# Altium PCB V2.pcbdoc
Units mm, origin at the board's own origin, x right, y up, seen from the top; angles counter-clockwise.
Board outline 51.05 x 52.08 mm, 2 copper layers (Top Layer, Bottom Layer); 21 components, 13 nets, 108 pads, 0 vias.
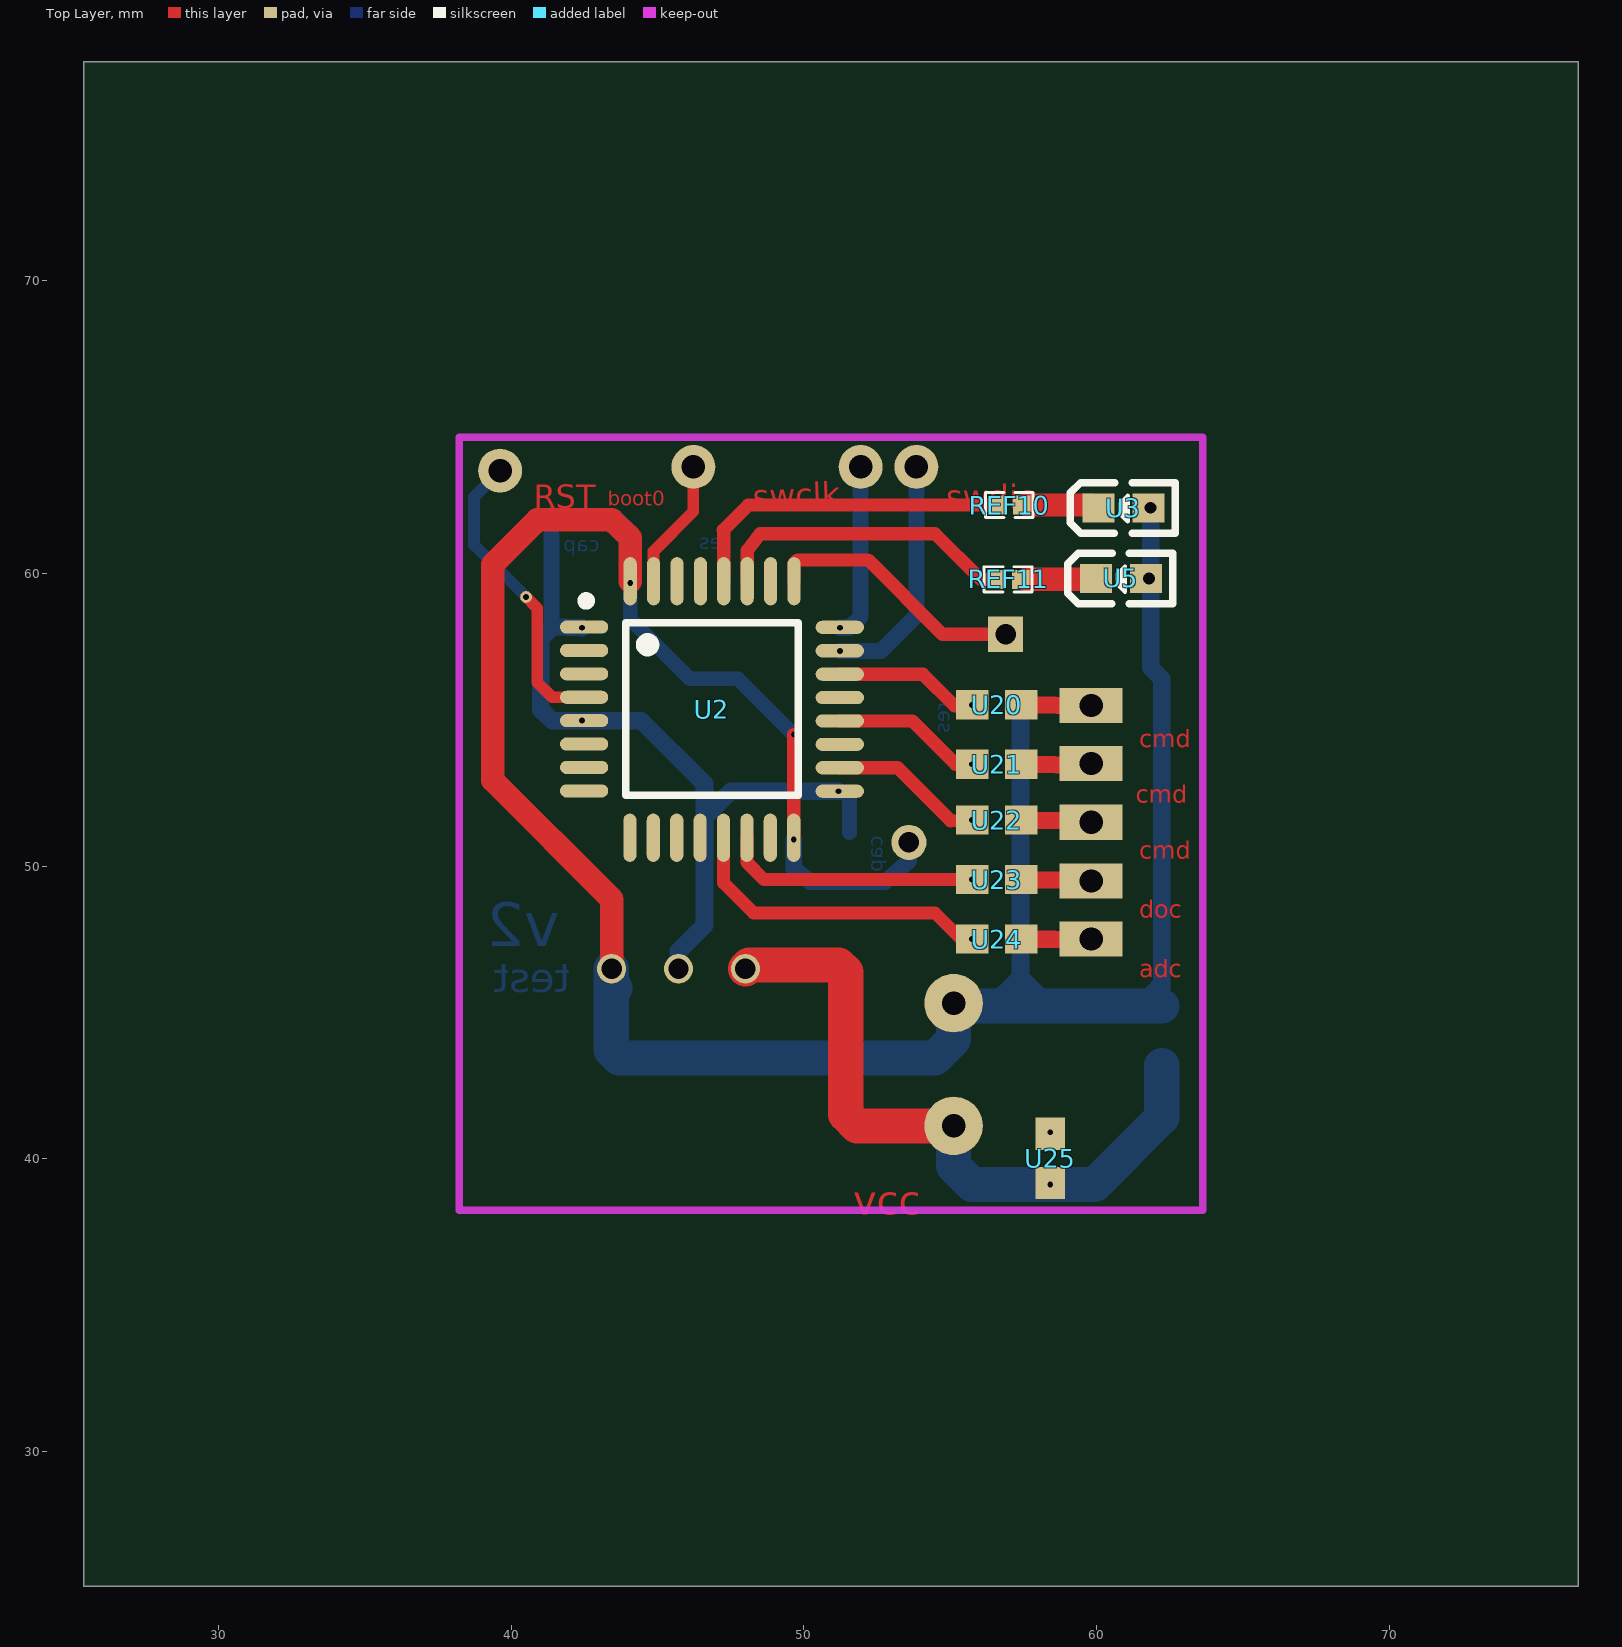
[diagram p0: Top Layer view]
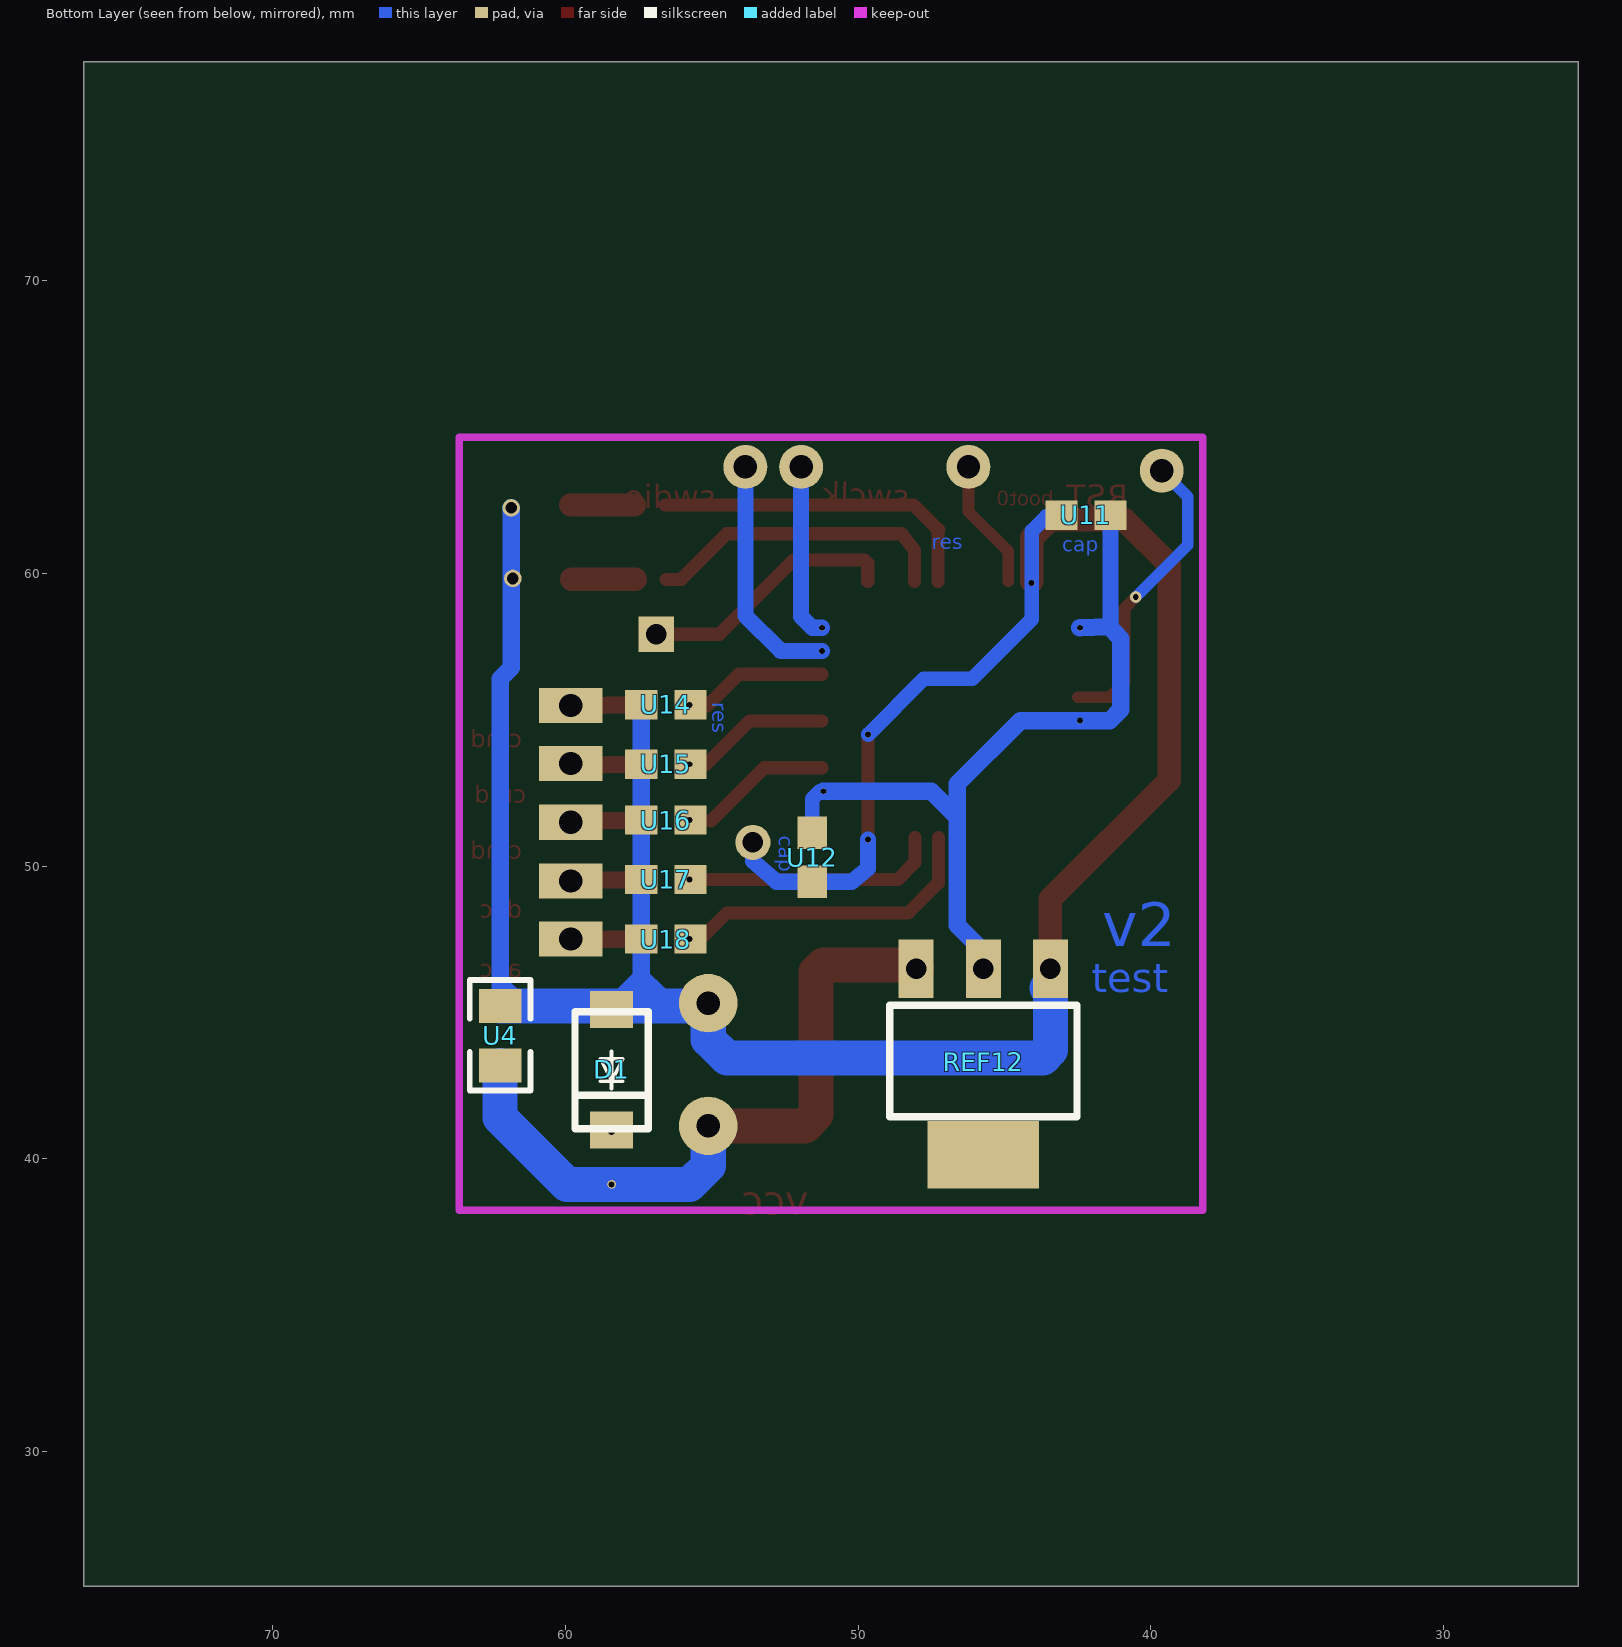
[diagram p1: Bottom Layer view, seen from below]

## Layer stack, top to bottom
Top Layer: signal copper (thickness not stored)
Dielectric: dielectric 0.32, FR-4, Dk 4.8
Bottom Layer: signal copper (thickness not stored)

## Board outline
76.454,25.4 25.4,25.4 25.4,77.485 76.454,77.485

## Components (designator, comment, footprint, x,y, rotation, side; value= is the part's Value field where it differs from the comment)
D1 "SMA(DO-214AC)-F" SMA(DO-214AC)-F 58.42,43.042 r90 bottom
REF10 "0402" 0402 57.023,62.34 r0 top
REF11 "0402" 0402 56.985,59.8 r0 top
REF12 "SOT-223" SOT-223 45.72,43.322 r90 bottom
U2 "TQFP-32_7X7X08P" TQFP-32_7X7X08P 46.863,55.355 r0 top
U3 "LED-0603" LED-0603 60.922,62.245 r0 top
U4 "0805" 0805 62.23,44.211 r90 bottom
U5 "LED-0603" LED-0603 60.833,59.832 r0 top
U11 "0603-RES" 0603-RES#1 42.215,61.991 r0 bottom
U12 "0603-RES" 0603-RES#1 51.562,50.307 r90 bottom
U14 "0603-RES" 0603-RES#1 56.566,55.514 r0 bottom
U15 "0603-RES" 0603-RES#1 56.566,53.482 r0 bottom
U16 "0603-RES" 0603-RES#1 56.566,51.577 r0 bottom
U17 "0603-RES" 0603-RES#1 56.566,49.545 r0 bottom
U18 "0603-RES" 0603-RES#1 56.566,47.513 r0 bottom
U20 "0603-RES" 0603-RES#2 56.591,55.514 r0 top
U21 "0603-RES" 0603-RES#2 56.591,53.482 r0 top
U22 "0603-RES" 0603-RES#2 56.591,51.577 r0 top
U23 "0603-RES" 0603-RES#2 56.591,49.545 r0 top
U24 "0603-RES" 0603-RES#2 56.591,47.513 r0 top
U25 "0603-RES" 0603-RES#2 58.42,40.02 r270 top

## Footprints (in the part's own frame and the unit in brackets; to place one, negate y for a bottom-side part, rotate by r counter-clockwise, add the part's x,y. Pads: shape width x height; smd on the part's side, far side on the other; paste and mask are expansions set on the pad)
0402 [mm]
  rect 0.6x0.65 smd: 1(-0.424,0) 2(0.424,0)
  silkscreen extent -0.82,-0.43 0.81,0.43
0603-RES#1 [mil]
  rect 43.3x39.4 smd: 1(33,0) 2(-33,0)
0603-RES#2 [mil]
  rect 43.3x39.4 smd: 1(-33,0) 2(33,0)
0805 [mm]
  rect 1.16x1.45 smd: 1(1.016,0) 2(-1.016,0)
  silkscreen extent -1.87,-1.04 1.9,1.03
LED-0603 [mil]
  rect 43x39 smd: 1(33.5,0) 2(-33.5,0)
  silkscreen extent -72,-34 70,34
SMA(DO-214AC)-F [mil]
  rect 50x57.9 smd: 1(-81,0) 2(81,0)
  silkscreen extent -79,-49 78,49
SOT-223 [mm]
  rect 2x1.2 smd: 1(3.175,-2.3) 2(3.175,0) 3(3.175,2.3)
  rect 2.3x3.8 smd: 4(-3.175,0)
  silkscreen extent -1.87,-3.2 1.93,3.2
TQFP-32_7X7X08P [mm]
  oval 1.65x0.45 smd: 1(-4.369,2.817) 2(-4.369,2.017) 3(-4.369,1.217) 4(-4.369,0.417) 5(-4.369,-0.381) 6(-4.369,-1.181) 7(-4.369,-1.981) 8(-4.369,-2.781) 17(4.369,-2.791) 18(4.369,-1.991) 19(4.369,-1.191) 20(4.369,-0.391) 21(4.369,0.406) 22(4.369,1.206) 23(4.369,2.007) 24(4.369,2.807)
  oval 0.45x1.65 smd: 9(-2.804,-4.381) 10(-2.004,-4.381) 11(-1.204,-4.381) 12(-0.404,-4.381) 13(0.394,-4.381) 14(1.194,-4.381) 15(1.994,-4.381) 16(2.794,-4.381) 25(2.804,4.381) 26(2.004,4.381) 27(1.204,4.381) 28(0.404,4.381) 29(-0.394,4.381) 30(-1.194,4.381) 31(-1.994,4.381) 32(-2.794,4.381)
  silkscreen extent -4.45,-2.94 2.95,3.86

## Free pads (board coordinates)
  round 2 hole 0.798: 1(55.118,45.322) 2(55.118,41.131)
  rect 1.2x1.2 hole 0.7: 1(56.896,57.927)
  round 1.2 hole 0.7: 2(53.594,50.815)
  round 0.2 hole 0.2: 37(42.418,54.974) 37(42.418,58.149) 37(44.069,59.673) 37(49.657,50.91) 37(49.657,54.498) 37(51.181,52.561) 37(51.236,57.355) 37(51.236,58.149)
  round 0.3 hole 0.2: 37(55.753,47.513) 37(55.753,49.545) 37(55.753,53.482) 37(55.753,55.514) 37(58.42,39.131) 37(58.42,40.909)
  round 0.4 hole 0.2: 37(55.753,51.577) 45(40.513,59.197)
  round 1 hole 0.7: 39(45.72,46.497) 39(48.006,46.497) 40(43.434,46.497)
  round 0.6 hole 0.4: 41(61.793,59.832) 41(61.849,62.245)
  round 1.5 hole 0.798: 44(39.624,63.515) 44(46.228,63.642) 44(51.943,63.642) 44(53.848,63.642)
  rect 2.159x1.199 hole 0.798: P1(59.817,55.488) P2(59.817,53.507) P3(59.817,51.501) P4(59.817,49.494) P5(59.817,47.513)

## Nets (pads, with @x,y where several pads share a name; then routed paths per layer and width w, separated by ;. In a path a pad name is that pad's centre, name@x,y a point inside that pad or via, vN(x,y) a via of type N, cw(c..) or ccw(c..) an arc to the next point about the centre after c; other vN are vias at no path point)
null: 
S$21: 
S$23: 
S$1525: D1.1 D1.2 pad.1 pad.2 pad.37@42.418,54.974 pad.37@42.418,58.149 pad.37@44.069,59.673 pad.37@49.657,50.91 pad.37@51.236,57.355 pad.37@51.236,58.149 pad.37@55.753,47.513 pad.37@55.753,49.545 pad.37@55.753,51.577 pad.37@55.753,53.482 pad.37@55.753,55.514 pad.37@58.42,39.131 pad.37@58.42,40.909 pad.39 pad.40 pad.41 pad.44 pad.P1 pad.P2 pad.P3 pad.P4 pad.P5 REF11.1 REF11.2 REF12.1 REF12.3 REF12.4 U2.1 U2.2 U2.3 U2.5 U2.6 U2.7 U2.8 U2.9 U2.10 U2.11 U2.12 U2.13 U2.15 U2.16 U2.17 U2.19 U2.21 U2.23 U2.24 U2.25 U2.26 U2.27 U2.29 U2.30 U2.31 U2.32 U3.2 U4.1 U4.2 U5.1 U5.2 U11.1 U11.2 U12.1 U12.2 U14.1 U14.2 U15.1 U15.2 U16.1 U16.2 U17.1 U17.2 U18.1 U18.2 U20.1 U20.2 U21.1 U21.2 U22.1 U22.2 U23.1 U23.2 U24.1 U24.2 U25.1 U25.2 | length 191.6
  Top Layer w0.4: U2.31 44.869,60.759 46.228,62.118 pad.44@46.228,63.642
  Top Layer w0.45: U2.13 47.257,49.431 48.285,48.402 54.483,48.402 55.372,47.513 U24.1 ; U2.27 48.067,60.787 48.514,61.356 54.483,61.356 56.039,59.8 REF11.1 ; U2.16@49.657,50.91 49.657,54.498 ; U2.25 49.667,60.35 49.784,60.467 52.197,60.467 54.737,57.927 pad.1@56.896,57.927 ; 51.232,54.964 53.706,54.964 55.188,53.482 U21.1
  Top Layer w0.5: U2.32@44.069,59.673 U2.32
  Top Layer w0.6: U24.2 59.787,47.482 pad.P5 ; U23.2 59.797,49.514 pad.P4 ; U22.2 59.771,51.546 pad.P3 ; U21.2 59.761,53.451 pad.P2 ; U20.2 59.812,55.483 pad.P1
  Top Layer w0.8: pad.40 43.434,48.877 39.37,52.941 39.37,60.307 40.894,61.831 43.434,61.831 44.069,61.229 U2.32 ; REF11.2@57.602,59.8 U5.2@59.779,59.8
  Top Layer w1.2: pad.39@48.006,46.497 48.133,46.624 51.181,46.624 51.435,46.388 51.435,41.512 51.816,41.131 pad.2@55.118,41.131
  Bottom Layer w0.55: 41.021,57.767 41.377,58.122 U11.2 ; pad.37@49.657,50.91 49.657,49.926 50.216,49.469 U12.2 52.781,49.469 53.594,50.18 pad.2@53.594,50.815 ; pad.37@51.237,57.355 52.263,57.355 52.642,57.355 53.848,58.562 pad.44@53.848,63.642 ; pad.37@51.237,58.148 51.562,58.148 51.943,58.529 pad.44@51.943,63.642
  Bottom Layer w0.6: pad.37@42.418,54.974 41.402,54.974 41.021,55.355 41.021,57.768 41.402,58.181 pad.37@42.418,58.149 ; pad.39@45.72,46.497 45.72,47.1 46.609,47.989 ; 56.834,45.227 58.383,45.227 57.404,46.206 U14.1 ; 56.896,45.608 56.769,45.608 56.832,45.636 57.404,46.205 ; U4.1@61.722,45.481 62.098,45.839 62.23,45.966 62.23,46.54 ; pad.41@61.849,62.245 61.849,56.784 62.23,56.403 U4.1
  Bottom Layer w1.2: REF12.1 43.42,45.971 REF12.1@43.548,45.843 ; REF12.1@43.421,46.497 43.421,43.716 43.688,43.449 54.483,43.449 55.118,44.084 55.118,45.321 55.213,45.227 U4.1 ; pad.2@55.118,41.131 55.118,39.766 55.753,39.131 58.42,39.131 59.944,39.131 62.23,41.417 U4.2
S$1605: REF10.2 | length 2.2
  Top Layer w0.8: REF10.2@57.64,62.34 59.817,62.34
S$3155: pad.37@49.657,54.498 pad.37@51.181,52.561 REF12.2 | length 28.2
  Bottom Layer w0.5: 43.393,61.959 43.561,61.959 44.069,61.451 44.069,59.673 44.069,58.435 46.101,56.403 47.752,56.403 pad.37@49.657,54.498 ; pad.37@51.181,52.56 51.308,52.56 51.562,52.306 51.562,51.163 51.562,51.145
  Bottom Layer w0.6: 42.418,54.974 44.45,54.974 46.609,52.815 46.609,51.127 ; 46.609,47.988 46.609,51.671 47.498,52.56 pad.37@51.181,52.56
S$8477: U3.1
S$8748: U2.14 | length 8.8
  Top Layer w0.45: U2.14 48.057,50.129 48.641,49.545 55.753,49.545
S$8766: REF10.1 U2.28 | length 11.5
  Top Layer w0.45: U2.28 47.267,61.46 47.244,61.483 48.101,62.34 REF10.1
S$8774: U2.18 | length 5.3
  Top Layer w0.45: U2.18 53.204,53.363 55.022,51.546 55.753,51.577
S$8777: U2.20
S$8796: U2.22 | length 5
  Top Layer w0.45: U2.22 54.071,56.561 55.149,55.483 55.753,55.514
S$9500: pad.45 U2.4 | length 10.3
  Top Layer w0.4: pad.45 40.894,58.816 40.894,56.276 41.399,55.77 U2.4
  Bottom Layer w0.4: 39.624,63.515 38.735,62.626 38.735,60.975 pad.45

## Other copper
Top Layer:
  text "boot0" at 43.307,62.307 h0.5
  text "RST" at 40.767,62.226 h0.8
  text "swclk" at 48.274,62.226 h0.8 r2
  text "swdio" at 54.864,62.226 h0.8
  text "cmd" at 61.468,54.071 h0.6
  text "cmd" at 61.341,52.168 h0.6
  text "cmd" at 61.468,50.261 h0.6
  text "doc" at 61.468,48.231 h0.6
  text "adc" at 61.468,46.199 h0.6
  text "vcc" at 51.689,38.1 h1
Bottom Layer:
  text "res" at 47.487,60.833 h0.5
  text "cap" at 43.028,60.738 h0.5
  text "res" at 54.987,55.609 h0.5 r90
  text "cap" at 52.701,51.037 h0.5 r90
  text "v2" at 41.656,47.271 h1.5
  text "test" at 42.016,45.687 h1